# EAGLE board freq_count_schematic_updated_11_6_2018 (EAGLE 9.2.2)
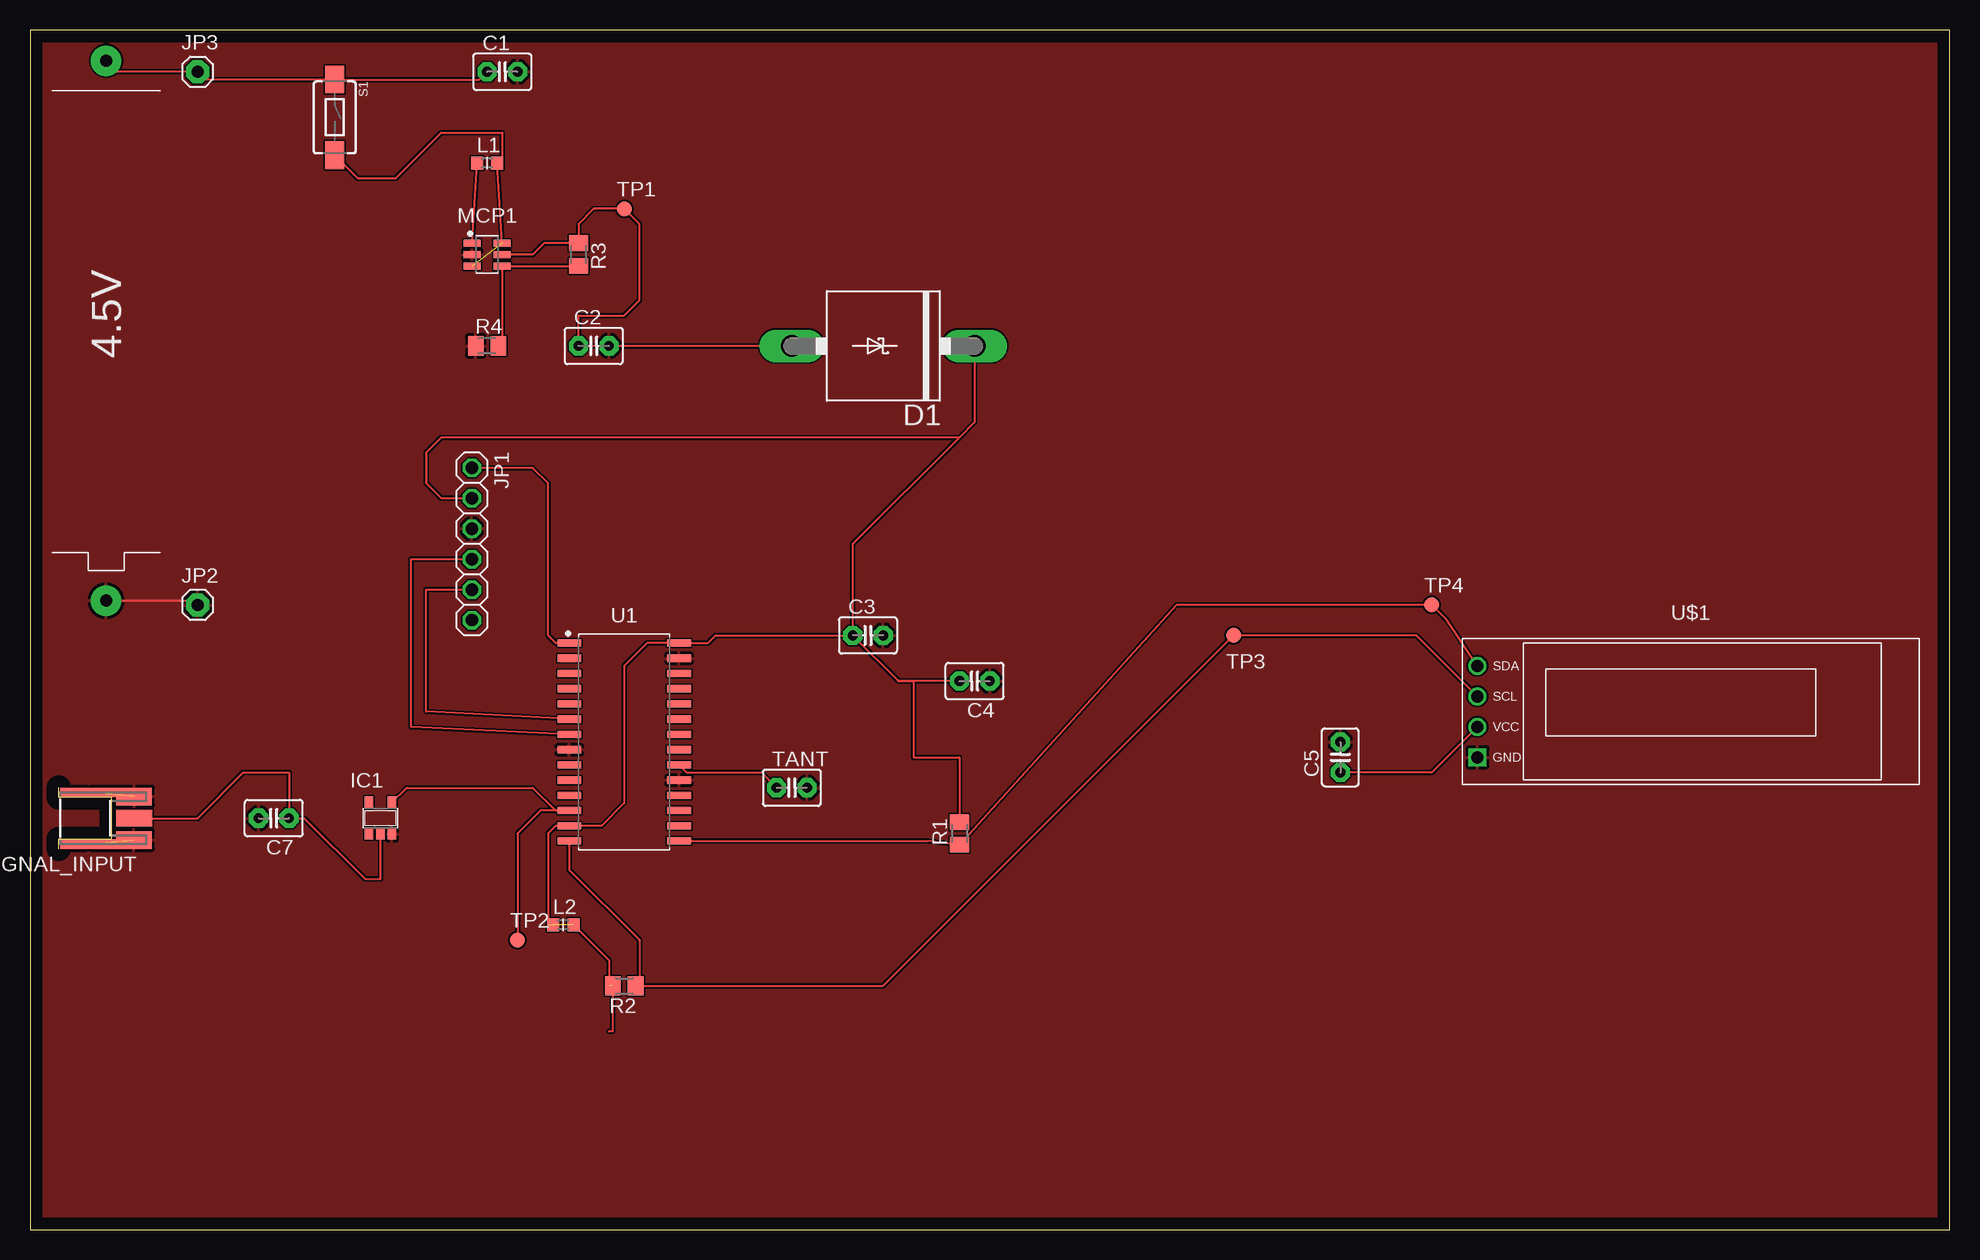
[diagram p0: board, top side]
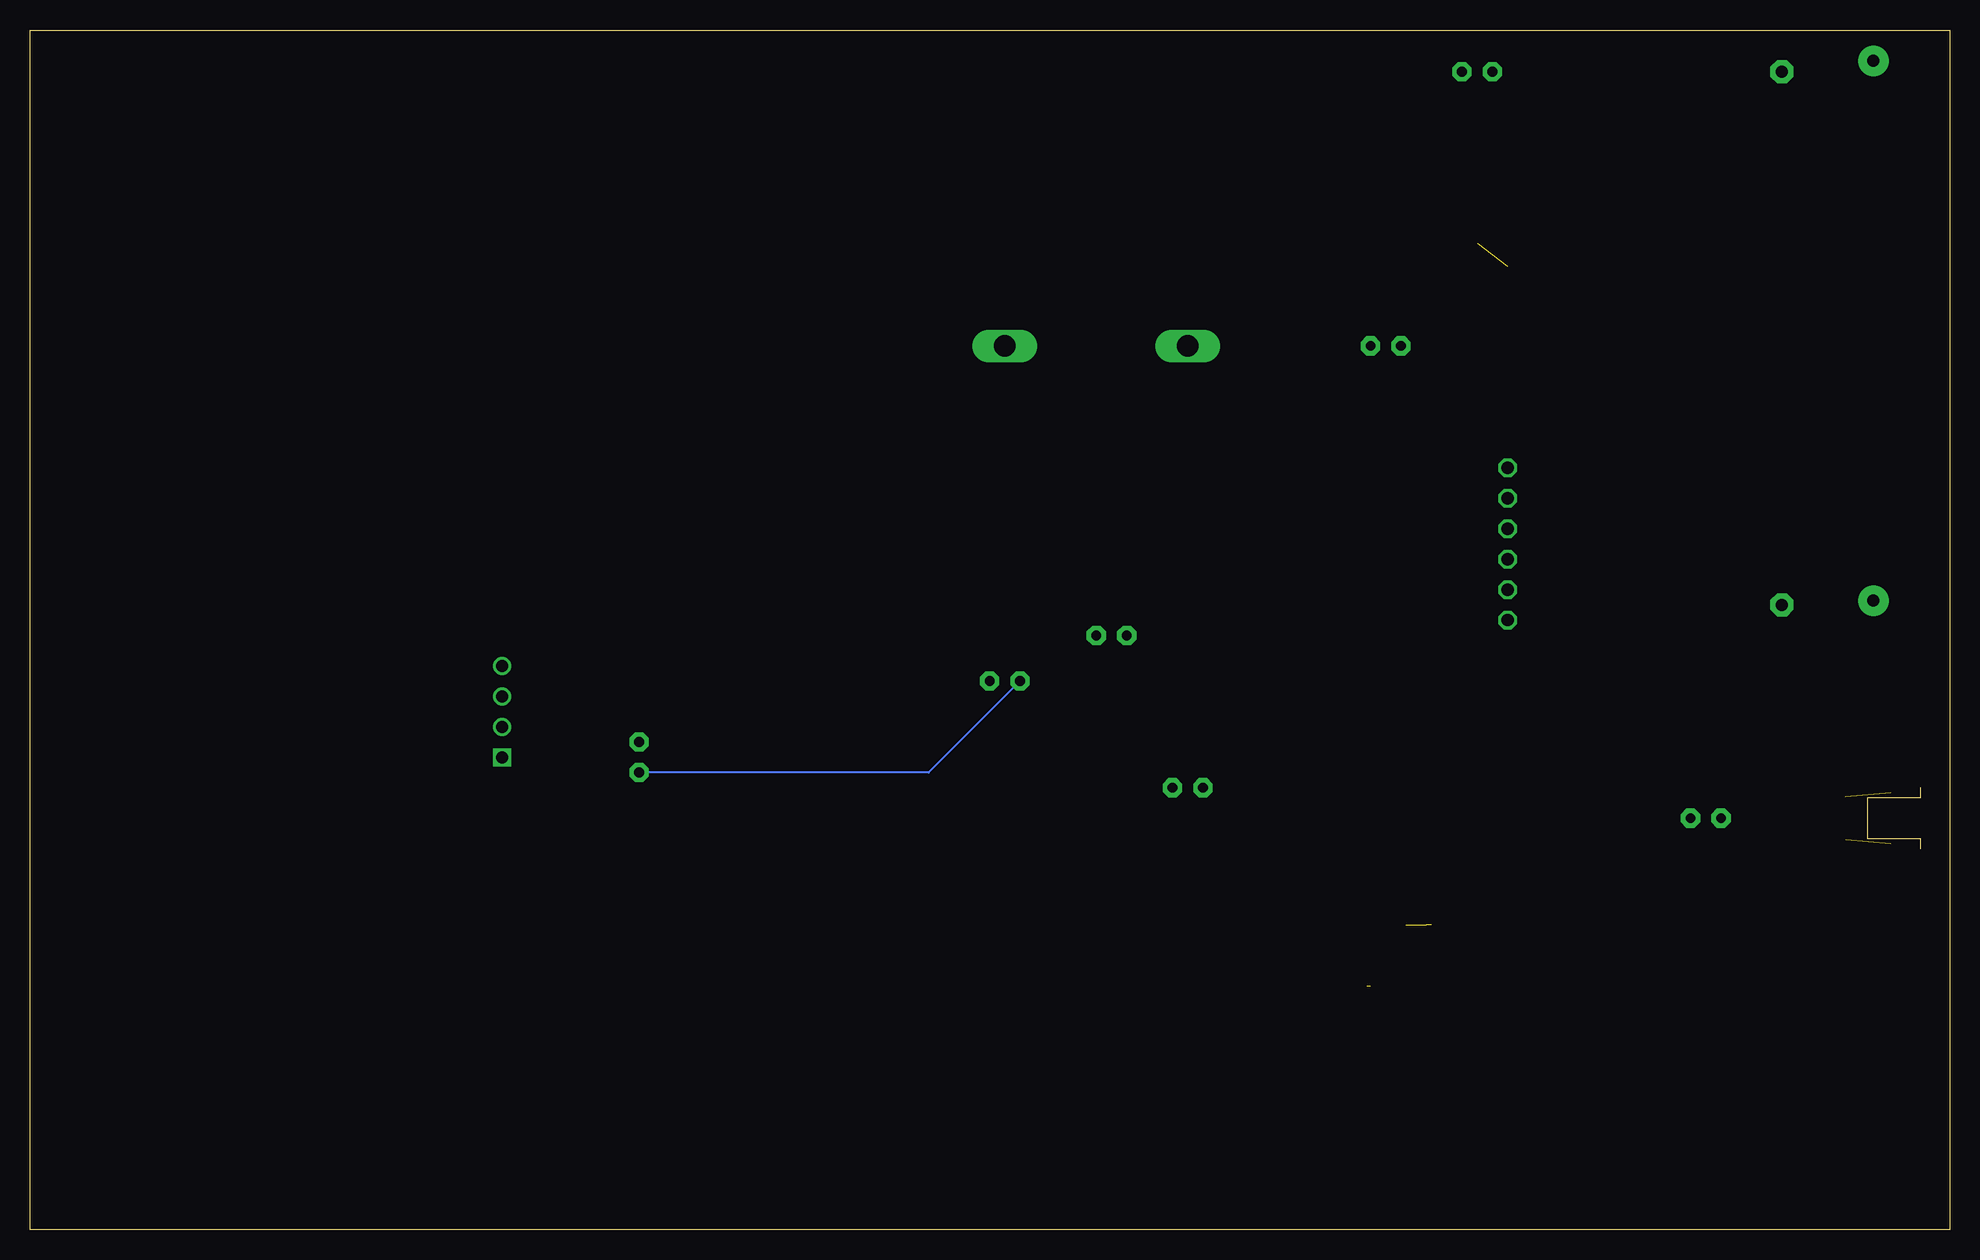
[diagram p1: board, bottom side, seen from below]

Size 160 x 100 mm. Coordinates in mm from the lower left corner, seen from the top.
Outline: 0,0 160,0 160,100 0,100 0,0
Copper layers (1*16): Top 0.035mm / dielectric 1.5mm / Bottom 0.035mm
Design rules "default": minimum track width 6mil, minimum drill 0.35mm, track to track 6mil, track to pad 6mil, pad to pad 6mil, via to via 6mil, smd to smd 6mil, copper to edge 40mil, drill to drill 6mil, minimum pad ring 10mil, minimum via ring 8mil, stop-mask expansion 4mil, vias tented up to drill 0mil, thermal gap 10mil

## Footprints (pad centres in the part's own frame; a part is rotated, then mirrored left to right if it is on the bottom)
12BH412 = drill 1 pad 2.54: + 22.5,0; - -22.5,0
C2.5-3 = drill 0.813 pad 1.6 octagon: 1 -1.27,0; 2 1.27,0
AG = drill 1.803 long: A 7.62,0; C -7.62,0
SOT23-5 = smd 0.69 x 0.99: 1 -0.95,-1.29; 2 0,-1.29; 3 0.95,-1.29; 4 0.95,1.3; 5 -0.95,1.3
1X06 = drill 1.016 octagon: 1 -6.35,0; 2 -3.81,0; 3 -1.27,0; 4 1.27,0; 5 3.81,0; 6 6.35,0
1X01 = drill 1.016 pad 1.93 octagon: 1 0,0
L0603 = smd 1 x 1.1: 1 -0.85,0; 2 0.85,0
SOP95P270X145-6 = smd 1.412 x 0.59: 1 -1.247,0.95; 2 -1.247,0; 3 -1.247,-0.95; 4 1.247,-0.95; 5 1.247,0; 6 1.247,0.95
M2012 = smd 1.3 x 1.6: 1 -0.95,0; 2 0.95,0
TACTILE-SWITCH-1101NE = smd 2.3 x 1.6: 1 -3.15,0; 2 3.15,0
MMCX-J-P-X-ST-EM1-MKT = smd 1.4 x 2.975: 1 0,-6.15 | smd 1.46 x 2.975: 2@1 -1.812,-6.125; 2@2 1.812,-6.138 | smd 0.76 x 4.7: 2@3 -2.163,-2.35; 2@4 2.163,-2.35
B1,27 = smd 1.27 x 1.27: TP 0,0
SOIC127P1020X265-28 = smd 1.968 x 0.599: 1 -4.573,8.255; 2 -4.573,6.985; 3 -4.573,5.715; 4 -4.573,4.445; 5 -4.573,3.175; 6 -4.573,1.905; 7 -4.573,0.635; 8 -4.573,-0.635; 9 -4.573,-1.905; 10 -4.573,-3.175; 11 -4.573,-4.445; 12 -4.573,-5.715; 13 -4.573,-6.985; 14 -4.573,-8.255; 15 4.573,-8.255; 16 4.573,-6.985; 17 4.573,-5.715; 18 4.573,-4.445; 19 4.573,-3.175; 20 4.573,-1.905; 21 4.573,-0.635; 22 4.573,0.635; 23 4.573,1.905; 24 4.573,3.175; 25 4.573,4.445; 26 4.573,5.715; 27 4.573,6.985; 28 4.573,8.255
DISPLAY-OLED-128X32 = drill 1 square: 1 -17.78,-3.81 | drill 1: 2 -17.78,-1.27; 3 -17.78,1.27; 4 -17.78,3.81

## Placement (x,y rotation side)
4.5V  AAA  [12BH412]  6.35,74.93 270 top
C1  4.7u  [C2.5-3]  39.37,96.52 0 top
C2  10u  [C2.5-3]  46.99,73.66 0 top
C3  1u  [C2.5-3]  69.85,49.53 0 top
C4  0.1u  [C2.5-3]  78.74,45.72 180 top
C5  0.1u  [C2.5-3]  109.22,39.37 90 top
C7  1u  [C2.5-3]  20.32,34.29 180 top
D1  [AG]  71.12,73.66 180 top
IC1  74AHC1G14DBV  [SOT23-5]  29.21,34.29 0 top
JP1  [1X06]  36.83,57.15 270 top
JP2  [1X01]  13.97,52.07 0 top
JP3  [1X01]  13.97,96.52 0 top
L1  4.7u  [L0603]  38.1,88.9 0 top
L2  [L0603]  44.45,25.4 0 top
MCP1  MCP1640  [SOP95P270X145-6]  38.1,81.28 0 top
R1  10k  [M2012]  77.47,33.02 90 top
R2  10k  [M2012]  49.53,20.32 180 top
R3  976k  [M2012]  45.72,81.28 270 top
R4  562k  [M2012]  38.1,73.66 0 top
S1  RS032G05A3SM-SPST-MOMENTARY-SWSMD-1101NE  [TACTILE-SWITCH-1101NE]  25.4,92.71 270 top
SIGNAL_INPUT  COAX  [MMCX-J-P-X-ST-EM1-MKT]  2.54,34.29 90 top
TANT  10u  [C2.5-3]  63.5,36.83 0 top
TP1  TPB1,27  [B1,27]  49.53,85.09 0 top
TP2  TPB1,27  [B1,27]  40.64,24.13 0 top
TP3  TPB1,27  [B1,27]  100.33,49.53 0 top
TP4  TPB1,27  [B1,27]  116.84,52.07 0 top
U1  DSPIC33EV256GM102_SOIC  [SOIC127P1020X265-28]  49.53,40.64 0 top
U$1  DISPLAY-OLED-128X32  [DISPLAY-OLED-128X32]  138.43,43.18 0 top

## Library data of the parts
4.5V = adafruit; MFG: Ketstone; MPN: 2464; VENDOR: Mouser
C1 = capacitor-wima; MFG: Panasonic Electronic Components; MPN: ECE-A1VKS4R7I; VENDOR: Digikey
C2 = capacitor-wima; MFG: Panasonic Electronic Components; MPN: ECA-1HM100; VENDOR: Digikey
C3 C7 = capacitor-wima; MFG: Panasonic Electronic Components; MPN: ECA-2CHG010; VENDOR: Digikey
C4 C5 = capacitor-wima; MFG: Panasonic Electronic Components; MPN: ECW-F6104JL; VENDOR: Digikey
D1 = adafruit; MFG: ON semiconductor; MPN: 1N5822G; VENDOR: Digikey
IC1 = 74xx-little-de; MFG: ON semiconductor; MPN: NC7WZ17P6XCT; VENDOR: Digikey
JP1-JP3 = adafruit
L1 = BeagleBone_Blue_R3; MFG: Bourns; MPN: CV201210-4R7K; VENDOR: Mouser
L2 = BeagleBone_Blue_R3
MCP1 = WBlib; MFG: Microchip Technology; MPN: MCP1640DT-I/CHY; VENDOR: Digikey
R1 R2 = adafruit; MFG: Bourns; MPN: CR1206-JW-114ELF; VENDOR: Mouser
R3 = adafruit; MFG: Bourns; MPN: CR0805-FX-9763elf; VENDOR: Mouser
R4 = adafruit; MFG: Bourms; MPN: CR0805-FX-5623ELF; VENDOR: Mouser
S1 = BeagleBone_Blue_R3; MFG: C&K; MPN: OS102011MS2QN1; PROD_ID: SWCH-00815; VENDOR: DIGIKEY
SIGNAL_INPUT = con-samtec; MF: Samtec Inc.; MFG: Cal Test Electronics; MPN: BKCT2942-100-ND; OC_FARNELL: unknown; OC_NEWARK: unknown; VENDOR: Digikey
TANT = capacitor-wima; MFG: KEMET; MPN: ESC106M035AC3AA; VENDOR: Digikey
TP1-TP4 = testpad
U1 = WBlib; MFG: Microchip Technology; MPN: DSPIC33EV256GM102; VENDOR: Digikey
U$1 = diy-modules; MFG: Generic; MPN: SSD1306; VENDOR: Amazon

## Nets
GND: 4.5V.+ C1.2 C2.2 C3.2 C4.1 C5.2 C7.2 IC1.3 JP1.3 JP2.1 MCP1.2 R4.1 SIGNAL_INPUT.2@1 SIGNAL_INPUT.2@2 SIGNAL_INPUT.2@3 SIGNAL_INPUT.2@4 TANT.2 U1.8 U1.19 U1.27 U$1.1
N$1: TANT.1 U1.20
N$2: 4.5V.- C1.1 JP3.1 S1.1
N$3: L1.2 MCP1.3 MCP1.6 S1.2
N$4: C3.1 C4.2 C5.1 D1.C JP1.2 L2.1 L2.2 R1.2 R2.2 U1.13 U1.28 U$1.2
N$5: R1.1 TP4.TP U1.15 U$1.4
N$6: C7.1 IC1.2 SIGNAL_INPUT.1
N$7: IC1.4 TP2.TP U1.12
N$8: C2.1 D1.A MCP1.5 R3.1 TP1.TP
N$9: R2.1 TP3.TP U1.14 U$1.3
N$11: L1.1 MCP1.1
N$12: MCP1.4 R3.2 R4.2
N$14: JP1.1 U1.1
N$16: JP1.4 U1.7
N$17: JP1.5 U1.6
VCC: IC1.5

## Tracks (layer width: path | path; a pad name or v marks a point on that pad's centre or on a via)
GND  (2 unrouted)
  Top 0.152: 4.5V.+ 13.61,52.43 JP2.1
  pour Top: -5.08,104.14 -5.08,-5.08 163.83,-5.08 163.83,100.33 163.83,104.14
N$1
  Top 0.152: U1.20 54.74,38.1 60.96,38.1 TANT.1
N$2
  Top 0.152: C1.1 37.44,95.86 S1.1 14.63,95.86 JP3.1 7.26,96.52 4.5V.-
N$3  (1 unrouted)
  Top 0.152: MCP1.6 38.95,88.88 | 38.95,88.88 L1.2 | S1.2 27.33,87.63 30.48,87.63 34.29,91.44 39.37,91.44 39.37,89.29 38.95,88.88
N$4  (3 unrouted)
  Top 0.152: D1.C 78.74,67.31 77.47,66.04 | 77.47,66.04 34.29,66.04 33.02,64.77 33.02,62.23 34.29,60.96 JP1.2 | C3.1 57.15,49.53 56.52,48.9 U1.28 51.44,48.9 49.53,46.99 49.53,35.56 47.62,33.66 U1.13 43.81,33.66 43.18,33.02 43.18,25.4 | 77.47,66.04 68.58,57.15 C3.1 | C4.2 72.39,45.72 | C3.1 72.39,45.72 | L2.2 48.26,22.44 48.26,20.32 | R2.2 48.58,16.51 48.26,16.51 | U$1.2 116.84,38.1 C5.1 | 72.39,45.72 73.66,45.72 73.66,39.37 77.47,39.37 R1.2
  Bottom 0.152: C4.2 85.09,38.1 C5.1
N$5
  Top 0.152: U1.15 74.83,32.38 R1.1 95.57,52.07 TP4.TP 118.11,50.8 U$1.4
N$6
  Top 0.152: SIGNAL_INPUT.1 13.97,34.29 17.78,38.1 21.59,38.1 C7.1 22.86,34.29 27.94,29.21 29.21,29.21 IC1.2
N$7
  Top 0.152: IC1.4 31.4,36.83 41.91,36.83 43.81,34.92 U1.12 42.55,34.92 40.64,33.02 TP2.TP
N$8
  Top 0.152: D1.A C2.1 45.72,76.2 49.53,76.2 50.8,77.47 50.8,83.82 TP1.TP 46.99,85.09 45.72,83.82 R3.1 42.86,82.23 41.91,81.28 MCP1.5
N$9
  Top 0.152: U$1.3 115.57,49.53 TP3.TP 71.12,20.32 R2.1 50.8,20.64 50.8,24.13 44.96,29.97 U1.14
N$11
  Top 0.152: MCP1.1 L1.1
N$12
  Top 0.152: R3.2 MCP1.4 39.35,73.96 R4.2
N$14
  Top 0.152: U1.1 43.81,48.9 43.18,49.53 43.18,62.23 41.91,63.5 JP1.1
N$16
  Top 0.152: U1.7 31.75,41.91 31.75,55.88 JP1.4
N$17
  Top 0.152: U1.6 33.02,43.18 33.02,53.34 JP1.5